# Altium PCB PCB.PcbDoc (part 2 of 2)
Units mm, origin at the board's own origin, x right, y up, seen from the top; angles counter-clockwise.
Board outline 107.57 x 49.78 mm, 2 copper layers (Top Layer, Bottom Layer); 218 components, 132 nets, 666 pads, 40 vias.
Unrouted connection lines stored in the file: 250.
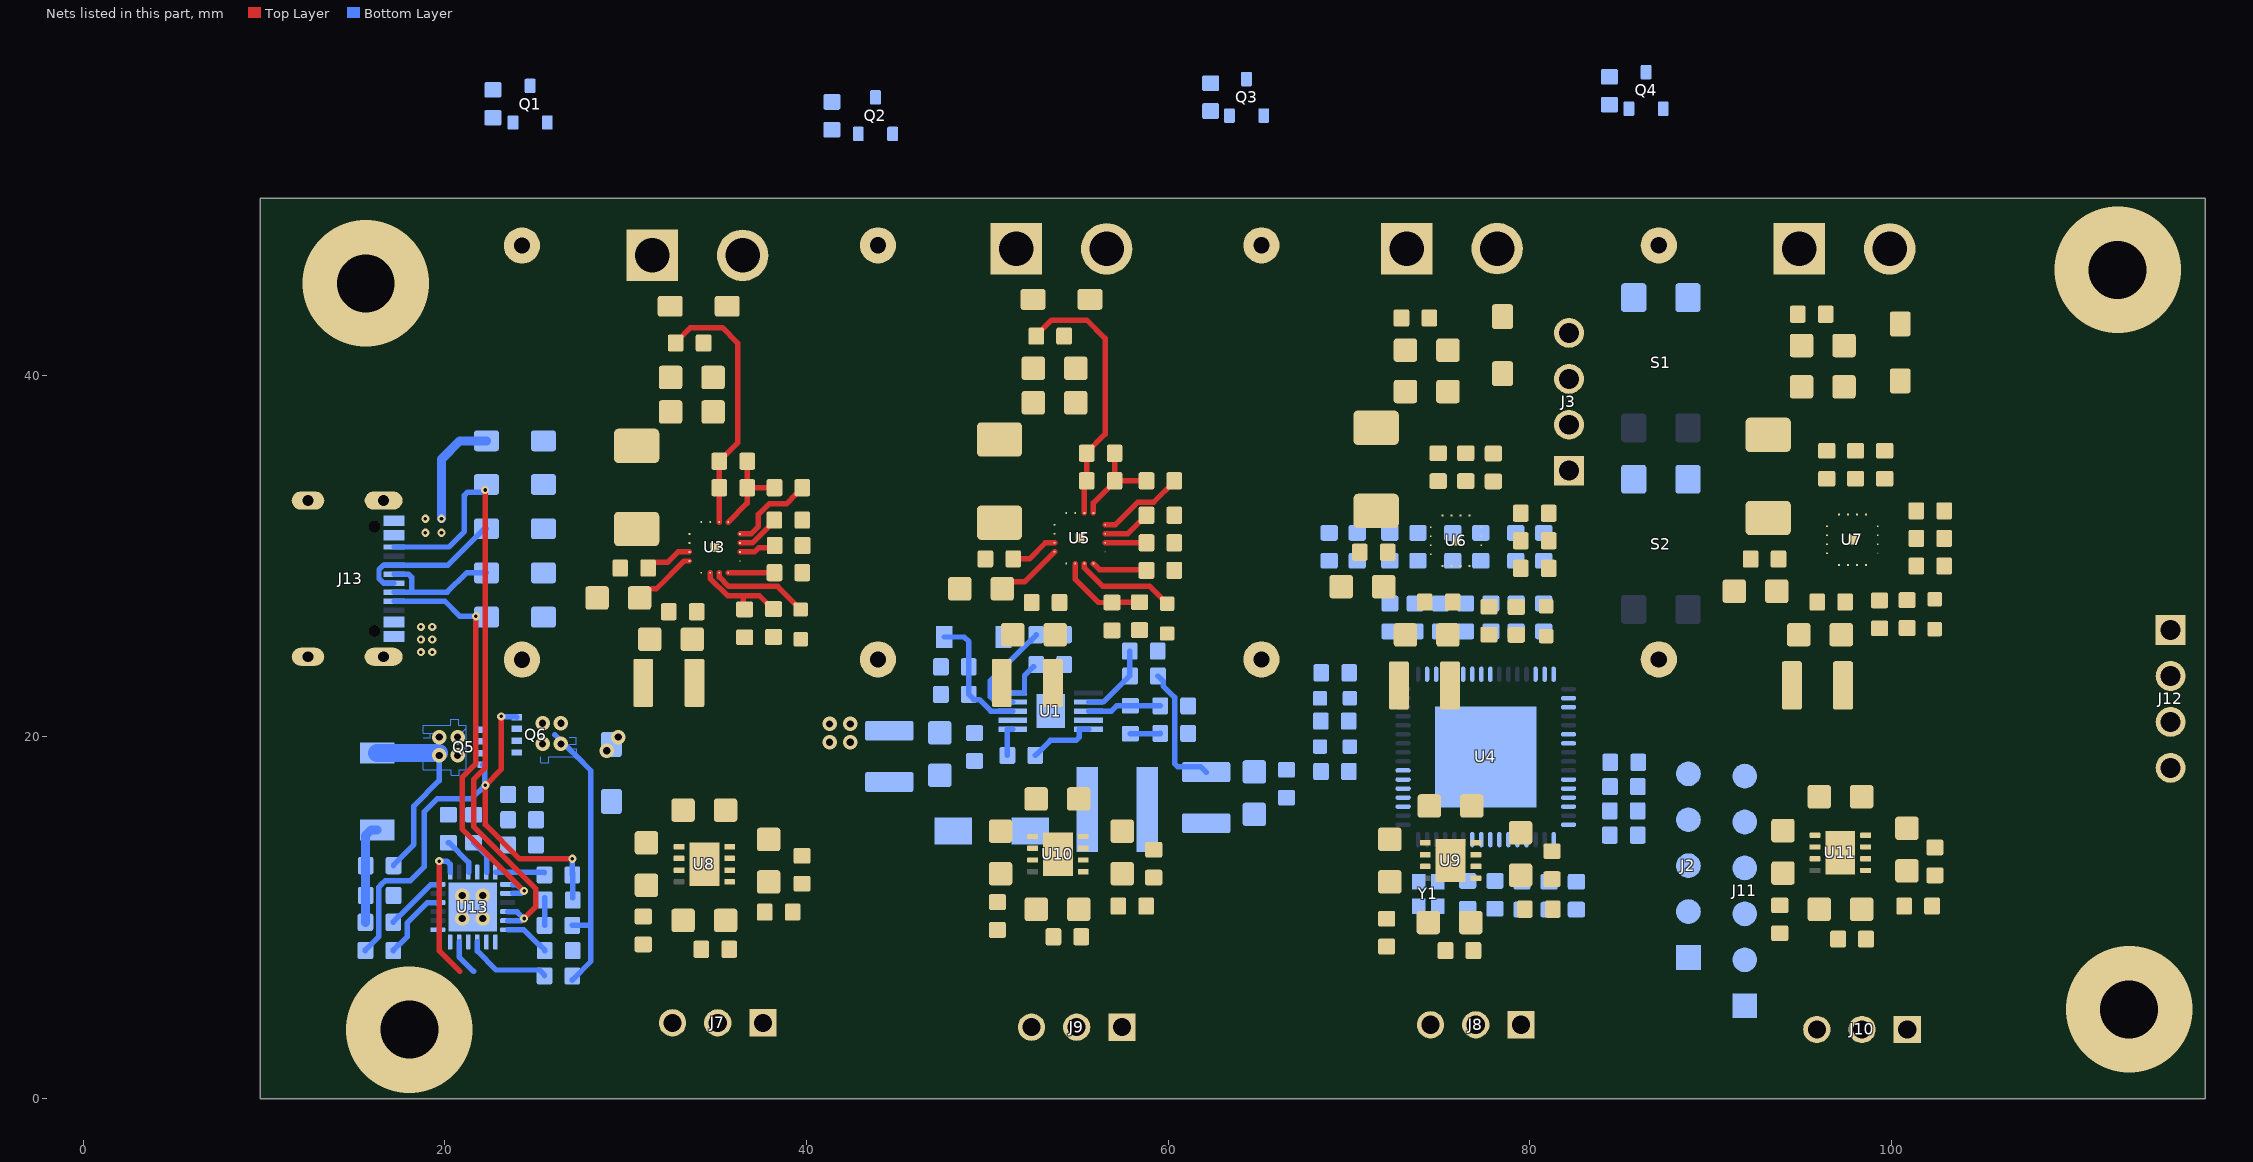
[diagram p2: the nets of this part, all layers, seen from the top]

## Footprints (in the part's own frame and the unit in brackets; to place one, negate y for a bottom-side part, rotate by r counter-clockwise, add the part's x,y. Pads: shape width x height; smd on the part's side, far side on the other; paste and mask are expansions set on the pad) (continued)
TRANS_SS8050-G [mm]
  rrect25% 0.8x0.6 smd: 1(-1.01,0.95) 2(-1.01,-0.95) 3(1.01,0)
  silkscreen extent -1.4,-1.45 0.65,1.91, body extent -1.2,-1.45 1.2,1.45, height 1.14
XGL5050 [mm]
  rect 1.18x4.7 smd: 1(-1.655,0) 2(1.655,0)
  silkscreen extent -2.64,-2.74 2.64,2.74, body extent -2.64,-2.75 2.64,2.73, height 5.2
XTAL_ECS-240-8-37CKM [mm]
  rect 0.85x0.75 smd paste+0 mask+0.102: 1(-0.675,-0.525) 2(0.675,-0.525) 3(0.675,0.525) 4(-0.675,0.525)
  silkscreen extent -1.8,-0.55 -1.6,-0.35, body extent -1,-0.8 1,0.8, height 0.55

## Part data
C1 C5 C11 C36 C46 C56: library part "Capacitor 22uF 1210", "22uF 50V 1210"
C2 C6 C12 C16 C17 C35 C41 C42 C45 C51 C52 C55 C61 C62 C64 C65 C66 C67 C68 C69 C70 C71 C72 C73 C74 C75 C76 C77 C78 C79: library part "Capacitor 10uF 0805", "10uF 50V 0805"
C3 C4 C7 C8 C9 C10 C13 C19 C21 C34 C39 C44 C49 C54 C59 C80 C85 C89 C90: library part "Capacitor 100nF 0603", "100nF 50V 0603"
  C80 C85 C89 C90: MP=KGF15AR71H104KM
C14 C38 C48 C58: library part "Capacitor 470pF 0603", "470pF 50V 0603"
C15 C37 C47 C57: library part "Capacitor 1nF 0603", "1nF 50V 0603"
C18 C43 C53 C63: library part "Capacitor 220nF 0603", "220nF 50V 0603"
C20 C40 C50 C60: library part "Capacitor 4.7uF 0805", "4.7uF 50V 0805"
C22 C23 C24 C25 C26 C27 C28 C29 C32 C33 C86: library part "Capacitor 1uF 0603", "1uF 50V 0603"
C30 C31: library part "Capacitor 15pF 0603", "15pF 50V 0603", MP=KAM15AR71H103MT
C87 C88: library part "Capacitor 10uF 0603", "10uF 10V 0603"
D1: "1A, 40V, Schottky Rectifier", Package=None, Availability=Unavailable, MP=SS14, Price=None
D2 D4 D5 D6 D8 D10: library part "LED 0603", "1.6x0.8mm Smd Chip Led Lamp", Package="0603 Kingbright", Availability="In Stock", Check_prices=https://www.snapeda.com/parts/KPT-1608ZGC/Kingbright/view-part/?ref=eda, MF=Kingbright, MP=KPT-1608ZGC, Price=None, SnapEDA_Link=https://www.snapeda.com/parts/KPT-1608ZGC/Kingbright/view-part/?ref=snap
D3 D7 D9 D11: "1-channel  50V ultra-low-capacitance IEC ESD protection diode", Package="X1SON-2 Texas Instruments", Availability=Good, DigiKey-Purchase-URL=https://snapeda.com/shop?store=DigiKey&id=383548, MF="Texas Instruments", Mouser-Purchase-URL=https://snapeda.com/shop?store=Mouser&id=383548, MP=TPD1E05U06DPYR, Price=None, SnapEDA_Link=https://www.snapeda.com/parts/TPD1E05U06DPYR/Texas%20Instruments/view-part/383548/?ref=snap, Texas_Instruments-Purchase-URL=https://snapeda.com/shop?store=Texas+Instruments&id=383548
D12: "5A, 40V, Schottky Rectifier", Package="SOD-128-2 Taiwan Semiconductor", Availability="In Stock", Check_prices=https://www.snapeda.com/parts/SS54FSH/Taiwan+Semiconductor/view-part/?ref=eda, MF="Taiwan Semiconductor", MP=SS54FSH, Price=None, SnapEDA_Link=https://www.snapeda.com/parts/SS54FSH/Taiwan+Semiconductor/view-part/?ref=snap
D18 D19 D20 D21: "1-channel  24V ultra-low-capacitance IEC ESD protection diode", Package="X1SON-2 Texas Instruments", Availability=Good, DigiKey-Purchase-URL=https://snapeda.com/shop?store=DigiKey&id=383548, MF="Texas Instruments", Mouser-Purchase-URL=https://snapeda.com/shop?store=Mouser&id=383548, MP=TPD1E05U06DPYR, Price=None, SnapEDA_Link=https://www.snapeda.com/parts/TPD1E05U06DPYR/Texas%20Instruments/view-part/383548/?ref=snap, Texas_Instruments-Purchase-URL=https://snapeda.com/shop?store=Texas+Instruments&id=383548
D22 D23: "1-channel  64V ultra-low-capacitance IEC ESD protection diode", Package="X1SON-2 Texas Instruments", Availability=Good, DigiKey-Purchase-URL=https://snapeda.com/shop?store=DigiKey&id=383548, MF="Texas Instruments", Mouser-Purchase-URL=https://snapeda.com/shop?store=Mouser&id=383548, MP=TPD1E05U06DPYR, Price=None, SnapEDA_Link=https://www.snapeda.com/parts/TPD1E05U06DPYR/Texas%20Instruments/view-part/383548/?ref=snap, Texas_Instruments-Purchase-URL=https://snapeda.com/shop?store=Texas+Instruments&id=383548
J1 J4 J5 J6: "Socket; DC supply; XT30; male; PIN: 2; on PCBs; THT; straight, Colour: yellow", Package=None, Check_prices=https://www.snapeda.com/parts/XT30PW-M/AMASS/view-part/?ref=eda, MF=AMASS, MP=XT30PW-M, SnapEDA_Link=https://www.snapeda.com/parts/XT30PW-M/AMASS/view-part/?ref=snap
J2: library part "5pin 2.54 SAMTEC", "2.54mm", Package=None, Availability=Unavailable, MF="{'manufacturer': 'TE Connectivity'}", MP=534237-4, Price=None
J3 J12: library part "4 pin header", "CONN HEADER VERT 4POS 2.54MM", Manufacturer_Name=SAMTEC, Datasheet Link=http://suddendocs.samtec.com/catalog_english/mtsw.pdf, Geometry.Height=8.64mm, Manufacturer_Part_Number=MTSW-104-07-G-S-000
  J12: MP="4 pin header"
J7 J8 J9 J10: "Connector Header Through Hole 3 position 0.098 (2.50mm)", Package=None, Check_prices=https://www.snapeda.com/parts/B3B-XH-A(LF)(SN)/JST/view-part/?ref=eda, MF="JST Sales", MP=B3B-XH-A(LF)(SN), SnapEDA_Link=https://www.snapeda.com/parts/B3B-XH-A(LF)(SN)/JST/view-part/?ref=snap
J11: library part "6 pin header", "CONN HEADER VERT 6POS 2.54MM", Manufacturer_Name=SAMTEC, Manufacturer_Part_Number=MTSW-104-07-G-S-000, Datasheet Link=http://suddendocs.samtec.com/catalog_english/mtsw.pdf, Geometry.Height=8.64mm, MP="4 pin header"
J13: Package=None, Availability=Unavailable, MF="{'manufacturer': u'GCT'}", MP=USBC-4105-GF-A, Price=None
L1: "10uH Shielded Molded Inductor 2.5 A", Manufacturer_Name=COILCRAFT, Manufacturer_Part_Number=XGL5050-153MEC, Datasheet Link=https://www.coilcraft.com/getmedia/348b2df6-54b3-4579-8737-e8367b6fa367/xgl5050.pdf, Geometry.Height=5.1mm
L2 L3 L4 L5: library part "1uH 9A", "1uH 9A  8.9mΩ"
Q1 Q2 Q3 Q4: "N-Channel 50 V 220mA (Ta) 350mW (Ta) Surface Mount SOT-23-3", Package="SOT-23-3 Motorola", Check_prices=https://www.snapeda.com/parts/BSS138/Onsemi/view-part/?ref=eda, MF=onsemi, MP=BSS138, SnapEDA_Link=https://www.snapeda.com/parts/BSS138/Onsemi/view-part/?ref=snap
Q5 Q6: "P-Channel 40 V 20A Surface", Package="SOT-23-3 Motorola", Check_prices=https://www.snapeda.com/parts/BSS138/Onsemi/view-part/?ref=eda, MF=onsemi, MP=BSS138, SnapEDA_Link=https://www.snapeda.com/parts/BSS138/Onsemi/view-part/?ref=snap
R1 R2 R3 R4 R5 R6 R52: library part "Resistor 100k 0603", "100k 0603"
  R52: MP=RCG0603100KFKEA
R7 R8 R9 R10 R11 R12 R13 R14 R15 R16 R17 R18 R19 R20 R21 R22 R23 R24 R25 R26 R27 R28 R29 R30 R31 R32 R33 R34 R35 R36 R37 R38 R39 R40 R41 R42 R43 R44 R45 R46 R47 R48 R49 R50 R51 R63 R64 R65 R66 R67 R68 R69 R70 R71 R77: library part "Resistor 10k 0603", "10k 0603"
  R77: MP=RE0603FRE1310KL
R53 R54 R59 R60: library part "15R 3W THT", "15R 3W THT"
R55 R56 R61 R62: library part CMP-009-00225-1, "10k 0603", Component Type=Standard, Design Item ID="Resistor 10k 0603", Pins=2, Source=0603.SchLib
R57: library part "Resistor 22.1K 0603", "22.1K 0603"
R58 R79: library part "Resistor 1k 0603", "1k 0603"
R72: library part "Resistor 100R 0603", "100R 0603", Manufacturer_Part_Number=RE0603FRE07100RL, MP=RE0603FRE07100RL
R78: library part "Resistor 470R 0603", "470R 0603"
S1 S2: "Tactile Switch SPST-NO Top Actuated Surface Mount", Package=None, Availability="In Stock", Check_prices=https://www.snapeda.com/parts/TL3305BF160QG/E-Switch/view-part/?ref=eda, MF=E-Switch, MP=TL3305BF160QG, Price=None, Purchase-URL=https://pricing.snapeda.com/search/part/TL3305BF160QG/?ref=eda, SnapEDA_Link=https://www.snapeda.com/parts/TL3305BF160QG/E-Switch/view-part/?ref=snap
U1: "3.5V to 60V Input, 1.5A Step-Down Converter with Eco-Mode 10-HVSSOP -40 to 150", Package="HVSSOP-10 Texas Instruments", Check_prices=https://www.snapeda.com/parts/TPS54160DGQRG4/Texas+Instruments/view-part/?ref=eda, MF="Texas Instruments", MP=TPS54160DGQRG4, SnapEDA_Link=https://www.snapeda.com/parts/TPS54160DGQRG4/Texas+Instruments/view-part/?ref=snap
U2: "Zener Diode 4.7V 500 mW ±2% Surface Mount SOD-123", Package="SOD-123-2 ON Semiconductor", Check_prices=https://www.snapeda.com/parts/SZMMSZ5248CT1G/Onsemi/view-part/?ref=eda, MF="ON Semiconductor", MP=SZMMSZ5248CT1G, SnapEDA_Link=https://www.snapeda.com/parts/SZMMSZ5248CT1G/Onsemi/view-part/?ref=snap
U3 U5 U6 U7: "TI Standalone 17-V, 3A 1-2 cell buck battery charger", Package="WFQFN-16 Texas Instruments", Check_prices=https://www.snapeda.com/parts/BQ25306RTER/Texas+Instruments/view-part/?ref=eda, MF="Texas Instruments", MP=BQ25306RTER, SnapEDA_Link=https://www.snapeda.com/parts/BQ25306RTER/Texas+Instruments/view-part/?ref=snap
U4: "8-bit AVR Microcontroller, 2.7-5.5V, 32KB Flash, 1KB EEPROM, 2KB SRAM, 64-pin MLF, Industrial Grade (-40°C to 85°C)", Code_JEDEC=MO-220-VMMD, ComponentLink1Description="Manufacturer URL", ComponentLink1URL=http://www.atmel.com/, ComponentLink2Description="ATmega329/3290/649/6490 Datasheet", ComponentLink2URL=http://www.atmel.com/dyn/resources/prod_documents/doc2552.pdf, ComponentLink3Description="ATmega329/3290/649/6490 Summary", ComponentLink3URL=http://www.atmel.com/dyn/resources/prod_documents/2552S.pdf, DatasheetVersion="revK, Apr-2011", PackageDescription="64-Pin Micro Lead Frame Package (MLF), 9 x 9 x 1.0 mm Body, 0.5 mm Pitch, 5.40 mm Exposed Pad", PackageReference=64M1, PackageVersion="revH, Oct-2010", RevisionNote="DatasheetVersion & PackageVersion updated. URLs added."
U8 U9 U10 U11: "Voltage Protection with Automatic Cell Balance For 2-Cell Li-Ion Batteries, OVP=4.30V", Package="VSON-8 Texas Instruments", Check_prices=https://www.snapeda.com/parts/BQ29209DRBR/Texas+Instruments/view-part/?ref=eda, MF="Texas Instruments", MP=BQ29209DRBR, SnapEDA_Link=https://www.snapeda.com/parts/BQ29209DRBR/Texas+Instruments/view-part/?ref=snap
U13: "USB Controller USB 2.0 I2C Interface 24-QFN (4x4)", Package="VFQFN-24 STMicroelectronics", Check_prices=https://www.snapeda.com/parts/STUSB4500QTR/STMicroelectronics/view-part/?ref=eda, MF=STMicroelectronics, MP=STUSB4500QTR, SnapEDA_Link=https://www.snapeda.com/parts/STUSB4500QTR/STMicroelectronics/view-part/?ref=snap
Y1: Case\Package=SOT-553-6, Max Operating Temperature="150 degC", Max Supply Voltage="3.3 V", Max Supply Voltage (DC)="6 V", Min Operating Temperature="-55 degC", Min Supply Voltage="1.4 V", Min Supply Voltage (DC)="4 V", Output Current="3 mA", Package Quantity=1, ComponentLink1Description="Manufacturer URL", ComponentLink1URL=http://www.foxonline.com/, ComponentLink2Description=Datasheet, ComponentLink2URL=http://foxonline.com/pdfs/hc49sdlf.pdf, DatasheetVersion=Mar-15, Height="0.55 mm", Interface=I2C, Length="1.6 mm", Mount="Surface Mount", PackageDescription="2-Pin Surface Mount Device, Body 5 x 11.7 mm, Height 4.5 mm", PackageReference=FOX-FOXSDLF160-20, Packaging="Cut Tape", Pins=6, Radiation Hardening=No, REACH SVHC="No SVHC", RoHSCompliant=true, Weight="9.9E-05 oz", Width="1.2 mm"

## Via types
v1: diameter 0.45, hole 0.2, Top Layer to Bottom Layer, 18 vias
v2: diameter 0.8, hole 0.4, Top Layer to Bottom Layer, 18 vias
v3: diameter 7, hole 3.2, Top Layer to Bottom Layer, 4 vias

## Nets (pads, with @x,y where several pads share a name; then routed paths per layer and width w, separated by ;. In a path a pad name is that pad's centre, name@x,y a point inside that pad or via, vN(x,y) a via of type N, cw(c..) or ccw(c..) an arc to the next point about the centre after c; other vN are vias at no path point)
5V: C5.2 C6.2 C7.2 C21.2 C22.2 C23.2 C24.2 J2.4 J3.3 J11.1 J12.2 L1.2 R5.2 R13.1 R16.1 R21.1 R51.2 U4.21 U4.52 U4.62 U4.64 | length 7.2
  Bottom Layer w0.3: R5.2@59.436,23.368 59.721,23.083 59.721,22.825 60.362,22.184 60.362,18.519 60.537,18.343 61.812,18.343 C5.2@62.103,18.052
-BAT1: C11.2 C12.2 C13.2 C16.1 C17.1 C18.1 C19.1 C20.1 C21.1 C22.1 C23.1 C24.1 C26.1 C27.1 C28.1 C29.1 C30.1 C31.1 C32.1 C33.1 C34.2 C35.2 C36.2 C39.1 C40.1 C41.1 C42.1 C43.1 C44.2 C45.2 C46.2 C49.1 C50.1 C51.1 C52.1 C53.1 C54.2 C55.2 C56.2 C59.1 C60.1 C61.1 C62.1 C63.1 C64.1 C65.1 C66.1 C67.1 C68.1 C69.1 C70.1 C71.1 C72.1 C73.1 C74.1 C75.1 C76.1 C77.1 C78.1 C79.1 C85.1 C86.1 C87.1 C88.1 C89.1 C90.1 D3.A D4.2 D5.2 D7.A D9.A D11.A D18.A D19.A D20.A D21.A D22.A D23.A J1.N J2.5 J3.4 J4.N J5.N J6.N J7.1 J8.1 J9.1 J10.1 J11.6 J12.1 J13.A1_B12 J13.B1_A12 J13.SH1 J13.SH2 J13.SH3 J13.SH4 Q1.2 Q2.2 Q3.2 Q4.2 R10.1 R11.1 R12.1 R22.2 R23.2 R24.2 R25.2 R29.1 R30.1 R31.1 R35.1 R36.1 R37.1 R41.1 R42.1 R43.1 R55.2 R56.2 R61.2 R62.2 R77.1 S1.2 S2.2 U3.11 U3.12 U3.17 U4.22 U4.53 U4.63 U4.65 U5.11 U5.12 U5.17 U6.11 U6.12 U6.17 U7.11 U7.12 U7.17 U8.5 U8.6 U8.9 U9.5 U9.6 U9.9 U10.5 U10.6 U10.9 U11.5 U11.6 U11.9 U13.10 U13.12 U13.13 U13.22 U13.25 Y1.2 Y1.4
  other v2: 20.955,9.957 22.098,9.957 20.955,11.227 22.098,11.227
  other v3: 18.034,3.81 113.15,4.933 15.621,45.085 112.515,45.827
BAT1: C14.2 C16.2 C19.2 C20.2 D3.C J1.P J7.3 L2.2 R7.2 R17.1 R53.2 R63.2 R64.2 U3.10 | length 14.4
  Top Layer w0.3: C19.2@32.853,41.91 33.58,42.637 35.341,42.637 36.195,41.783 36.195,36.263 R7.2@35.179,35.247 ; U3.10@35.175,31.88 35.175,33.778 C14.2@35.179,33.782 R7.2@35.179,35.287
BAT2: C38.2 C39.2 C40.2 C41.2 D7.C J4.P J9.3 L3.2 R19.1 R26.2 R48.2 R50.2 R54.2 U5.10 | length 14.7
  Top Layer w0.3: C39.2@52.705,42.164 52.705,42.204 53.554,43.053 55.499,43.053 56.515,42.037 56.515,36.743 55.499,35.727 R26.2@55.499,35.687 55.499,33.94 55.368,33.809 U5.10@55.368,32.388
BAT3: C48.2 C49.2 C50.2 C51.2 D9.C J5.P J8.3 L4.2 R20.1 R32.2 R44.2 R45.2 R59.2 U6.10
BAT4: C58.2 C59.2 C60.2 C61.2 D11.C J6.P J10.3 L5.2 R18.1 R38.2 R49.2 R60.2 R67.2 U7.10
BTN1: C26.2 R13.2 S1.4 U4.16
BTN2: C27.2 R16.2 S2.4 U4.17
CC1: D18.C J13.A5 U13.1 U13.2 | length 23.3
  Top Layer w0.3: v1(21.717,26.67) 21.717,18.526 20.955,17.764 20.955,14.91 v1(24.384,11.481)
  Bottom Layer w0.3: J13.A5@17.184,27.503 19.995,27.503 20.828,26.67 v1(21.717,26.67) ; U13.2@23.741,11.36 24.223,11.36 v1@24.343,11.481 ; U13.1@23.741,11.82 24.004,11.82 v1@24.343,11.481 ; v1@24.343,11.481 v1(24.384,11.481) v1@24.343,11.481
CC2: D19.C J13.B5 U13.4 U13.5 | length 35.2
  Top Layer w0.3: v1(22.225,33.655) 22.225,18.288 21.59,17.653 21.59,15.037 25.019,11.608 25.019,10.592 v1(24.384,9.957)
  Bottom Layer w0.3: J13.B5@17.184,30.503 20.216,30.503 21.082,31.369 21.082,33.359 21.258,33.535 22.105,33.535 v1(22.225,33.655) ; U13.5@23.471,9.84 24.227,9.84 24.343,9.957 v1(24.384,9.957) 24.361,9.957 23.998,10.32 23.491,10.32 U13.4@23.471,10.34
DATA+: D20.C J13.A6 J13.B6 | length 8.3
  Bottom Layer w0.3: J13.A6@17.184,28.503 16.603,28.503 16.357,28.749 16.357,29.257 16.603,29.503 J13.B6@17.184,29.503 20.174,29.503 22.186,31.515 D20.C@22.301,31.515
DATA-: D21.C J13.A7 J13.B7 | length 7.4
  Bottom Layer w0.3: J13.B7@17.184,28.003 18.157,28.003 ; J13.A7@17.184,29.003 17.981,29.003 18.157,28.827 18.157,28.003 ; D21.C@22.301,29.07 21.196,29.07 20.129,28.003 18.157,28.003
DCHG: R58.1 U13.9 | length 4.8
  Bottom Layer w0.3: U13.9@21.791,8.66 21.791,8.154 22.838,7.107 25.224,7.107 25.509,6.822 R58.1@25.509,6.782
DIS1: Q1.1 R55.1 U4.38
DIS2: Q2.1 R56.1 U4.37
DIS3: Q3.1 R61.1 U4.36
DIS4: Q4.1 R62.1 U4.35
FAN_PWM: J12.3 U4.14
FAN_TACHO: J12.4 R51.1 U4.39
GND1: C1.1 C2.1 C3.1 C5.1 C6.1 C7.1 C8.1 C9.1 C10.1 D1.A R2.1 R3.1 R6.1 U1.9 U1.11 U2.2
MBAT1: J7.2 R65.2 R66.2
MBAT2: J9.2 R68.2 R70.2
MBAT3: J8.2 R46.2 R47.2
MBAT4: J10.2 R69.2 R71.2
MISO: J11.3 U4.13
MOSI: J11.4 U4.12
NetC4_1: C4.1 U1.1 | length 1.7
  Bottom Layer w0.3: C4.1@51.112,18.977 51.112,20.429 U1.1@51.407,20.429
NetC4_2: C4.2 D1.C L1.1 U1.10 | length 3.8
  Bottom Layer w0.3: C4.2@52.654,18.977 53.489,19.812 54.917,19.812 55.092,19.988 55.092,20.429 U1.10@55.607,20.429
NetC8_2: C8.2 U1.4 | length 5.9
  Bottom Layer w0.3: U1.4@51.407,21.929 50.461,21.929 50.165,22.225 50.165,23.114 52.38,25.329 52.42,25.329 52.705,25.614 C8.2@52.705,25.654
NetC9_2: C9.2 R4.2 U1.8 | length 4.1
  Bottom Layer w0.3: U1.8@55.607,21.429 56.862,21.429 57.15,21.717 R4.2@57.912,21.717 ; R4.2@57.872,21.717 C9.2@59.563,21.717
NetC10_2: C10.2 R4.1 | length 1.7
  Bottom Layer w0.3: R4.1@57.912,20.175 57.921,20.184 59.554,20.184 C10.2@59.563,20.193
NetC14_1: C14.1 R7.1 R8.2 U3.9 | length 5.3
  Top Layer w0.3: U3.9@35.675,31.88 36.721,32.926 C14.1@36.721,33.782 ; R7.1@36.721,35.247 C14.1@36.721,33.782 ; R8.2@38.227,33.782 C14.1@36.721,33.782
NetC15_1: C15.1 L2.1 U3.13 U3.14
NetC15_2: C15.2 U3.15 | length 2.7
  Top Layer w0.3: C15.2@31.242,29.337 31.242,29.377 31.527,29.662 32.329,29.662 32.897,30.23 33.225,30.23 U3.15@33.525,30.23
NetC17_2: C17.2 U3.16 | length 3.6
  Top Layer w0.3: C17.2@30.766,27.686 31.258,28.178 31.426,28.178 31.442,28.194 31.696,28.194 33.232,29.73 U3.16@33.525,29.73
NetC18_2: C18.2 R9.1 U3.2 | length 5.3
  Top Layer w0.3: U3.2@34.675,29.08 34.675,28.766 35.628,27.813 36.507,27.813 ; C18.2@36.576,27.051 36.507,27.12 36.507,27.813 ; R9.1@38.17,27.069 38.13,27.069 37.386,27.813 36.507,27.813
NetC25_1: C25.1 J2.1
NetC25_2: C25.2 J11.5 R21.2 U4.20
NetC30_2: C30.2 U4.23 Y1.1
NetC31_2: C31.2 U4.24 Y1.3
NetC37_1: C37.1 L3.1 U5.13 U5.14
NetC37_2: C37.2 U5.15 | length 2.7
  Top Layer w0.3: C37.2@51.435,29.845 52.32,29.845 53.213,30.738 U5.15@53.718,30.738
NetC38_1: C38.1 R26.1 R28.2 U5.9 | length 5.5
  Top Layer w0.3: U5.9@55.868,32.388 55.868,32.94 56.756,33.828 56.756,33.878 C38.1@57.041,34.163 ; R26.1@57.041,35.687 C38.1@57.041,34.163 ; R28.2@58.801,34.163 C38.1@57.041,34.163
NetC42_2: C42.2 U5.16 | length 3.7
  Top Layer w0.3: C42.2@50.832,28.194 51.213,28.575 52.055,28.575 U5.16@53.718,30.238
NetC43_2: C43.2 R27.1 U5.2 | length 5
  Top Layer w0.3: U5.2@54.868,29.588 54.868,28.706 56.142,27.432 C43.2@56.896,27.432 56.905,27.441 58.411,27.441 R27.1@58.42,27.45
NetC47_1: C47.1 L4.1 U6.13 U6.14
NetC47_2: C47.2 U6.15
NetC48_1: C48.1 R32.1 R34.2 U6.9
NetC52_2: C52.2 U6.16
NetC53_2: C53.2 R33.1 U6.2
NetC57_1: C57.1 L5.1 U7.13 U7.14
NetC57_2: C57.2 U7.15
NetC58_1: C58.1 R38.1 R40.2 U7.9
NetC62_2: C62.2 U7.16
NetC63_2: C63.2 R39.1 U7.2
NetC64_2: C64.2 R45.1 U9.7
NetC65_2: C65.2 R44.1 U9.1
NetC66_2: C66.2 R46.1 U9.2
NetC67_2: C67.2 U9.4
NetC68_2: C68.2 R50.1 U10.7
NetC69_2: C69.2 R64.1 U8.7
NetC70_2: C70.2 R63.1 U8.1
NetC71_2: C71.2 R65.1 U8.2
NetC72_2: C72.2 U8.4
NetC73_2: C73.2 R67.1 U11.7
NetC74_2: C74.2 R48.1 U10.1
NetC75_2: C75.2 R68.1 U10.2
NetC76_2: C76.2 U10.4
NetC77_2: C77.2 R49.1 U11.1
NetC78_2: C78.2 R69.1 U11.2
NetC79_2: C79.2 U11.4
NetC80_1: C80.1 R72.2 | length 1.5
  Bottom Layer w0.3: C80.1@25.509,9.576 25.518,9.585 25.518,11.091 R72.2@25.527,11.1
NetC85_2: C85.2 C86.2 C87.2 Q5.1 Q5.2 Q5.3 Q6.1 Q6.2 Q6.3 R52.1 U13.24 | length 2.7
  Bottom Layer w0.3: U13.24@22.815,12.51 22.821,12.503 25.502,12.503 R52.1@25.509,12.497
NetC88_2: C88.2 U13.23 | length 1.9
  Bottom Layer w0.3: C88.2@21.59,14.148 22.315,13.423 U13.23@22.315,12.51
NetC89_2: C89.2 U13.21 | length 2.1
  Bottom Layer w0.3: C89.2@20.193,14.148 20.233,14.148 21.315,13.066 U13.21@21.315,12.51
NetC90_2: C90.2 D12.C R78.1 R79.1 | length 5.6
  Bottom Layer w0.5: R79.1@15.603,9.745 15.603,11.311 15.603,12.878 15.603,14.521 15.938,14.856 D12.C@16.256,14.856
NetD2_1: D2.1 R9.2
NetD2_2: D2.2 U3.3 | length 5.5
  Top Layer w0.3: U3.3@35.175,29.08 35.175,28.834 35.688,28.321 38.401,28.321 D2.2@39.676,27.045
NetD4_1: D4.1 R14.1
NetD5_1: D5.1 R15.1
NetD6_1: D6.1 R27.2
NetD6_2: D6.2 U5.3 | length 5.6
  Top Layer w0.3: U5.3@55.368,29.588 55.368,29.342 56.389,28.321 58.991,28.321 D6.2@59.944,27.368
NetD8_1: D8.1 R33.2
NetD8_2: D8.2 U6.3
NetD10_1: D10.1 R39.2
NetD10_2: D10.2 U7.3
NetJ2_2: J2.2 U4.3
NetJ2_3: J2.3 U4.2
NetQ1_3: Q1.3 R53.1
NetQ2_3: Q2.3 R54.1
NetQ3_3: Q3.3 R59.1
NetQ4_3: Q4.3 R60.1
NetQ5_4: Q5.4 Q6.4 R52.2 R57.1 R72.1 | length 30.2
  Top Layer w0.3: v1(23.114,21.133) 23.114,18.197 v1(22.24,17.323) 22.24,15.149 24.13,13.259 v1(27.051,13.259)
  Bottom Layer w0.3: R57.1@15.603,8.179 15.603,8.219 16.344,8.96 16.344,11.695 16.476,11.827 16.687,12.038 18.083,12.038 18.868,12.823 18.868,15.871 19.58,16.583 21.485,16.583 22.225,17.323 v1(22.24,17.323) 22.211,17.351 22.211,18.426 22.186,18.451 Q5.4@22.098,18.451 ; v1(23.114,21.133) 23.135,21.112 23.957,21.112 Q6.4@23.977,21.092 ; R52.2@27.051,12.37 v1(27.051,13.259) ; R52.2@27.051,12.497 27.06,12.488 27.06,11.109 R72.1@27.069,11.1
NetR1_1: R1.1 R2.2 U1.3 U2.1 | length 7.2
  Bottom Layer w0.3: U2.1@47.625,25.527 48.722,25.527 48.976,25.273 R1.1@48.976,22.346 ; R1.1@48.976,22.352 R1.1@48.976,22.346 ; U1.3@51.407,21.429 50.199,21.429 49.567,22.061 49.261,22.061 R1.1@48.976,22.346
NetR3_2: R3.2 U1.5 | length 2.3
  Bottom Layer w0.3: U1.5@51.407,22.429 52.057,22.429 52.057,23.395 52.538,23.876 R3.2@52.578,23.876
NetR5_1: R5.1 R6.2 U1.7 | length 4.2
  Bottom Layer w0.3: U1.7@55.607,21.929 56.424,21.929 57.886,23.391 57.886,24.735 R6.2@57.878,24.743
NetR8_1: R8.1 U3.8 | length 4.9
  Top Layer w0.3: U3.8@36.325,31.23 36.934,31.23 37.341,31.637 37.341,32.311 37.923,32.893 38.88,32.893 39.444,33.457 39.484,33.457 39.769,33.742 R8.1@39.769,33.782
NetR10_2: R10.2 U3.6 | length 2.1
  Top Layer w0.3: U3.6@36.325,30.23 37.125,30.23 37.353,30.458 38.113,30.458 R10.2@38.238,30.584
NetR11_2: R11.2 U3.4 | length 2.6
  Top Layer w0.3: U3.4@35.675,29.08 38.224,29.08 R11.2@38.227,29.083
NetR12_2: R12.2 U3.7 | length 2.4
  Top Layer w0.3: U3.7@36.325,30.73 37.002,30.73 38.223,31.951 R12.2@38.223,31.991
NetR14_2: R14.2 U4.51
NetR15_2: R15.2 U4.50
NetR28_1: R28.1 U5.8 | length 4.9
  Top Layer w0.3: U5.8@56.518,31.738 57.079,31.738 58.325,32.985 59.205,32.985 60.343,34.123 R28.1@60.343,34.163
NetR29_2: R29.2 U5.6 | length 2.3
  Top Layer w0.3: U5.6@56.518,30.738 56.522,30.734 R29.2@58.801,30.734
NetR30_2: R30.2 U5.4 | length 3.1
  Top Layer w0.3: U5.4@55.868,29.588 56.206,29.25 58.761,29.25 R30.2@58.801,29.21
NetR31_2: R31.2 U5.7 | length 2.7
  Top Layer w0.3: U5.7@56.518,31.238 57.781,31.238 58.476,31.933 58.516,31.933 58.804,32.221 R31.2@58.804,32.261
NetR34_1: R34.1 U6.8
NetR35_2: R35.2 U6.6
NetR36_2: R36.2 U6.4
NetR37_2: R37.2 U6.7
NetR40_1: R40.1 U7.8
NetR41_2: R41.2 U7.6
NetR42_2: R42.2 U7.4
NetR43_2: R43.2 U7.7
NetR47_1: R47.1 U9.3
NetR66_1: R66.1 U8.3
NetR70_1: R70.1 U10.3
NetR71_1: R71.1 U11.3
NetR79_2: R79.2 U13.18 | length 3.4
  Bottom Layer w0.3: R79.2@17.145,9.745 17.145,9.785 17.43,10.07 17.47,10.07 19.23,11.83 U13.18@19.635,11.83
SCK: J11.2 U4.11
SCL: J3.1 U4.6 U13.7
SDA: J3.2 U4.7 U13.8
SENSE1: C28.2 R17.2 R22.1 U4.57
SENSE2: C29.2 R19.2 R24.1 U4.56
SENSE3: C32.2 R20.2 R25.1 U4.55
SENSE4: C33.2 R18.2 R23.1 U4.54
USB_ALRT: U4.25 U13.19 | length 7.7
  Top Layer w0.3: v1(19.685,13.132) 19.685,8.179 20.828,7.036
  Bottom Layer w0.3: v1(19.685,13.132) 20.115,13.132 20.291,12.956 U13.19@20.291,12.52
USB_ATTACH: U4.26 U13.11 | length 2
  Bottom Layer w0.3: U13.11@20.791,8.66 20.791,7.835 21.59,7.036
USB_RST: R77.2 U13.6 | length 2.5
  Bottom Layer w0.3: U13.6@23.495,9.33 24.376,9.33 25.202,8.504 25.242,8.504 25.527,8.219 R77.2@25.527,8.179
VB_USB-C: D12.A D22.C J13.A4_B9 J13.B4_A9 Q5.5 R78.2 | length 16.8
  Bottom Layer w0.3: R78.2@17.158,12.878 17.158,12.918 18.288,14.047 18.288,16.18 19.685,17.577 19.685,18.651 v2(19.685,18.974)
  Bottom Layer w0.5: v1(19.812,32.068) 19.812,35.357 20.828,36.373 D22.C@22.301,36.373
  Bottom Layer w1: D12.A@16.256,19.106 v2@19.673,19.106
  other v1: 18.669,24.689 19.304,24.689 18.669,25.387 19.304,25.387 18.669,26.086 19.304,26.086 18.923,31.293 19.812,31.293 18.923,32.068
  other v2: 20.701,18.974 19.685,19.99 20.701,19.99
VBUS: C1.2 C2.2 C3.2 C11.1 C12.1 C13.1 C34.1 C35.1 C36.1 C44.1 C45.1 C46.1 C54.1 C55.1 C56.1 C80.2 D23.C Q6.5 R1.2 R58.2 U1.2 U3.1 U5.1 U6.1 U7.1 | length 15.8
  Bottom Layer w0.3: Q6.5@26.085,20.12 26.506,19.699 26.87,19.335 27.296,18.908 28.067,18.137 28.067,9.576 ; R58.2@27.051,6.528 27.051,6.568 28.067,7.584 28.067,9.576 ; C80.2@27.051,9.576 28.067,9.576
  other v2: 28.956,19.228 25.4,19.609 26.416,19.609 41.275,19.703 42.418,19.703 29.591,19.99 41.275,20.719 42.418,20.719 25.4,20.752 26.416,20.752
VBUS_C_EN: R57.2 U13.16 | length 4.1
  Bottom Layer w0.3: R57.2@17.145,8.179 17.145,8.219 17.43,8.504 17.47,8.504 17.907,8.941 17.907,9.703 19.034,10.83 U13.16@19.635,10.83
pads on no net: J13. J13.A8 J13.B8 S1.1 S1.3 S2.1 S2.3 U1.6 U3.5 U4.1 U4.4 U4.5 U4.8 U4.9 U4.10 U4.15 U4.18 U4.19 U4.27 U4.28 U4.29 U4.30 U4.31 U4.32 U4.33 U4.34 U4.40 U4.41 U4.42 U4.43 U4.44 U4.45 U4.46 U4.47 U4.48 U4.49 U4.58 U4.59 U4.60 U4.61 U5.5 U6.5 U7.5 U8.8 U9.8 U10.8 U11.8 U13.3 U13.14 U13.15 U13.17 U13.20

## Polygon pours and split planes (outlines as drawn)
VB_USB-C on Bottom Layer "VB_USB-C_L02_P007" (solid, pour order 7): 16.637,30.912 16.637,31.42 18.161,31.42 18.542,31.801 18.542,32.436 20.193,32.436 20.193,30.912
NetC85_2 on Bottom Layer "NETC85_2_L02_P009" (solid, pour order 9): 22.606,12.116 24.003,12.116 24.003,18.466 24.511,18.974 24.511,20.752 21.59,20.752 21.59,18.847 22.606,18.847 22.606,12.37
VB_USB-C on Bottom Layer "VB_USB-C_L02_P006" (solid, pour order 6): 16.604,26.056 16.604,26.647 19.505,26.647 19.685,26.467 19.685,24.308 18.288,24.308 18.288,25.832 18.064,26.056
5V on Bottom Layer "5V_L02_P004" (solid, pour order 4): 58.166,13.589 59.436,13.589 59.436,15.494 61.214,17.272 67.31,17.272 67.31,18.923 58.166,18.923
NetC4_2 on Bottom Layer "NETC4_2_L02_P003" (solid, pour order 3): 56.388,20.574 54.737,20.574 54.737,16.256 54.102,15.621 51.308,15.621 51.308,13.97 51.689,13.589 56.388,13.589
VBUS on Bottom Layer "VBUS_L02_P002" (solid, pour order 2): 52.198,21.082 52.197,21.081 52.197,20.783 50.628,20.783 49.294,19.449 40.64,19.449 40.64,21.082 52.197,21.082
-BAT1 on Bottom Layer "NONET_L02_P001" (solid, shelved, pour order 1): 0,0 0,49.911 117.348,49.911 117.348,0
VBUS on Top Layer "VBUS_L01_P017" (solid, pour order 17): 54.48,29.854 54.126,29.854 53.083,28.811 53.083,20.066 54.48,20.066
BAT2 on Top Layer "BAT2_L01_P016" (solid, pour order 16): 53.21,48.757 49.908,48.757 49.908,38.089 49.273,37.454 49.273,35.549 52.702,35.549 53.21,36.057
NetC37_1 on Top Layer "NETC37_1_L01_P015" (solid, pour order 15): 53.888,31.675 53.888,31.025 50.845,31.025 50.289,30.469 50.289,29.326 49.4,29.326 49.4,32.247 53.324,32.247 53.888,31.836
VBUS on Top Layer "VBUS_L01_P014" (solid, pour order 14): 34.417,29.357 34.063,29.357 33.02,28.314 33.02,19.558 34.417,19.558
BAT1 on Top Layer "BAT1_L01_P013" (solid, pour order 13): 33.147,48.26 29.845,48.26 29.845,37.592 29.21,36.957 29.21,35.052 32.639,35.052 33.147,35.56
NetC15_1 on Top Layer "NETC15_1_L01_P012" (solid, pour order 12): 33.825,31.178 33.825,30.528 30.782,30.528 30.226,29.972 30.226,28.829 29.337,28.829 29.337,31.75 33.261,31.75 33.825,31.339
VBUS on Top Layer "VBUS_L01_P010" (solid, remove dead copper, pour order 10): 98.933,21.336 24.765,21.336 24.765,18.288 98.933,18.288
VB_USB-C on Top Layer "VB_USB-C_L01_P005" (solid, pour order 5): 18.288,32.436 21.082,32.436 21.082,18.339 18.288,18.339
-BAT1 on Top Layer "NONET_L01_P000" (solid, shelved, pour order 0): 0,0 0,49.911 117.348,49.911 117.348,0

## Other copper
Bottom Layer:
  rectangle net VBUS: 52.197,20.783 52.198,21.082

## Text inside footprints (layer, text, board x,y; h text height)
J13: Mechanical 13 "PCB EDGE" at 9.929,34.153 h0.41 r270